# EAGLE board switch (EAGLE 9.2.2)
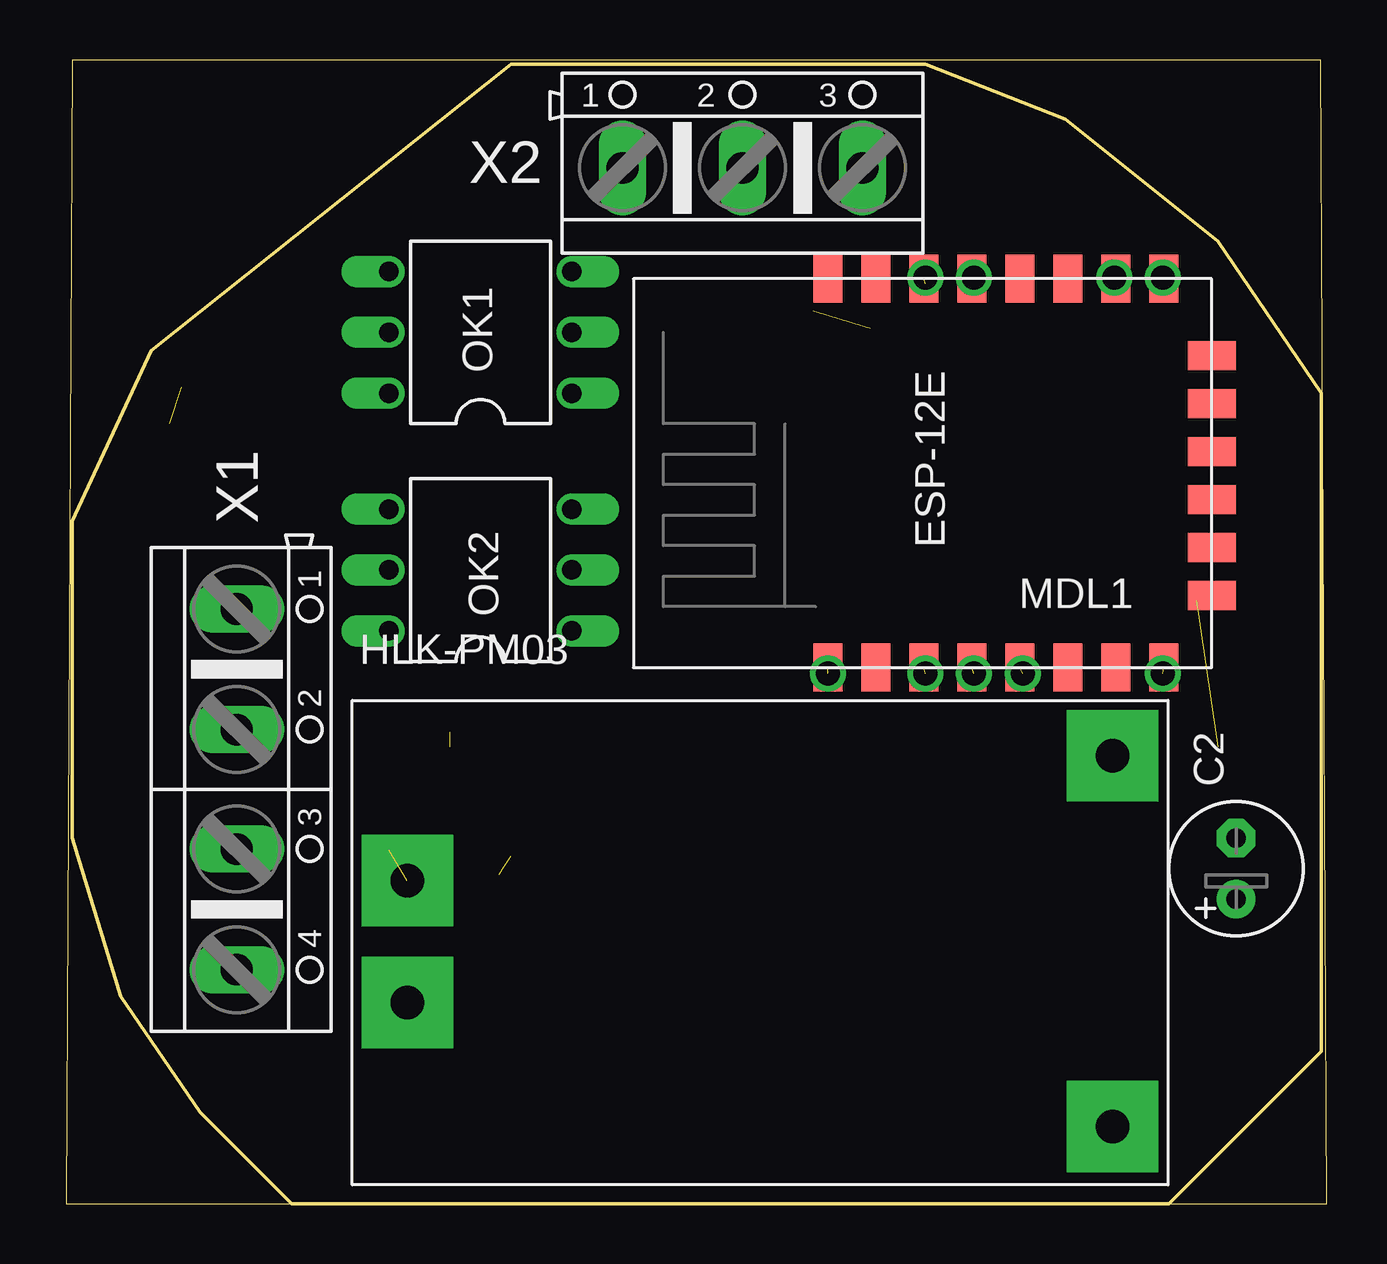
[diagram p0: board, top side]
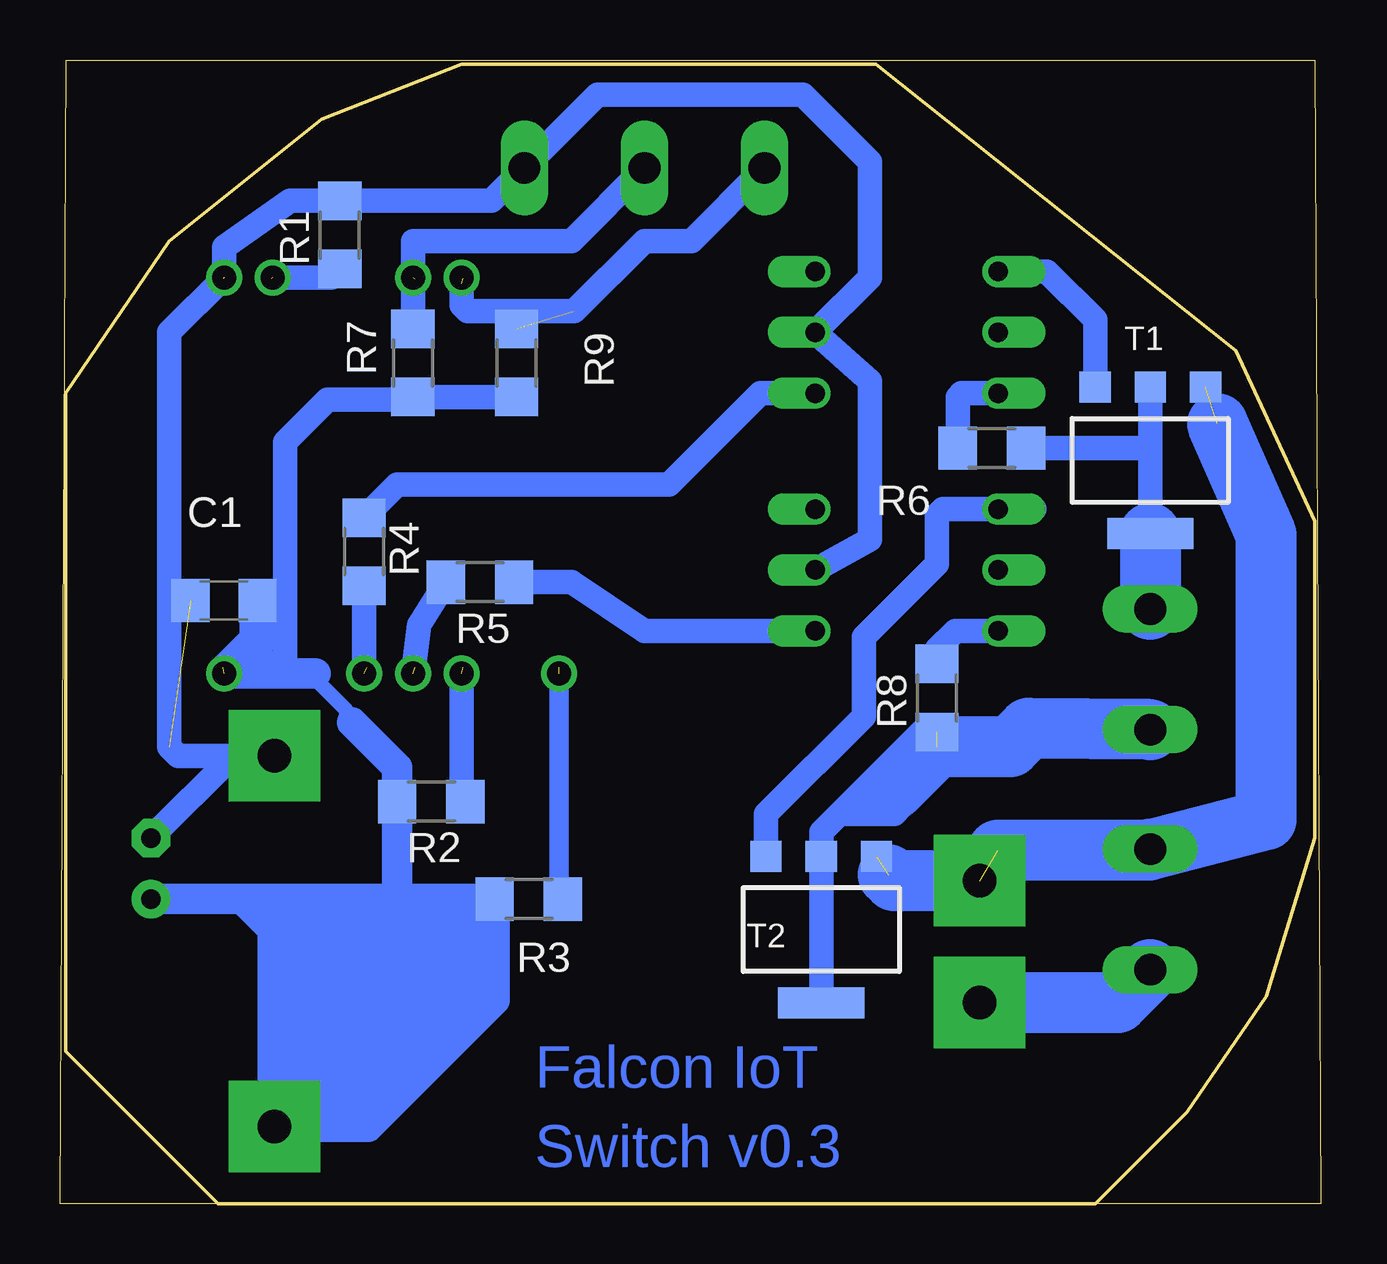
[diagram p1: board, bottom side, seen from below]

Size 52.56 x 47.68 mm. Coordinates in mm from the lower left corner, seen from the top.
Outline: 9.4,0 0,0 0.25,47.68 52.3,47.68 52.56,0 45.97,0
Outline: 45.97,0 52.32,6.35 52.32,33.78 48.01,40.13 41.66,45.21 35.81,47.5 18.54,47.5 3.56,35.56 0.25,28.45 0.25,15.24 2.29,8.64 5.59,3.81 9.4,0
Outline: 9.4,0 45.97,0
Copper layers (1*16): Top 0.035mm / dielectric 1.5mm / Bottom 0.035mm
Design rules "default": minimum track width 6mil, minimum drill 0.35mm, track to track 6mil, track to pad 6mil, pad to pad 6mil, via to via 6mil, smd to smd 6mil, copper to edge 40mil, drill to drill 6mil, minimum pad ring 10mil, minimum via ring 8mil, stop-mask expansion 4mil, vias tented up to drill 0mil, thermal gap 10mil

## Footprints (pad centres in the part's own frame; a part is rotated, then mirrored left to right if it is on the bottom)
C1206 = smd 1.6 x 1.8: 1 -1.4,0; 2 1.4,0
E2,5-6 = drill 0.813 pad 1.6: + -1.27,0 | drill 0.813 pad 1.6 octagon: - 1.27,0
ESP8266-ESP12E = smd 2 x 1.2: 1 0,16; 2 0,14; 3 0,12; 4 0,10; 5 0,8; 6 0,6; 7 0,4; 8 0,2; 9 16.2,2; 10 16.2,4; 11 16.2,6; 12 16.2,8; 13 16.2,10; 14 16.2,12; 15 16.2,14; 16 16.2,16 | smd 1.2 x 2: 17 11,0; 18 3,0; 19 5,0; 20 13,0; 21 7,0; 22 9,0
DIL06 = drill 0.813 offset: 1 -2.54,-3.81; 2 0,-3.81; 3 2.54,-3.81; 4 2.54,3.81; 5 0,3.81; 6 -2.54,3.81
R1206 = smd 1.6 x 1.803: 1 -1.422,0; 2 1.422,0
SOT223 = smd 1.3 x 1.3: 1 -2.3,-3.05; 2 0,-3.05; 3 2.3,-3.05 | smd 3.6 x 1.3: 4 0,3.05
HLK-PM03 = drill 1.4 pad 3.81 square: +VO 29.4,-5.167; -VO 29.4,10.294; AC1 0,5.08; AC2 0,0
AK500/4 = drill 1.321 long: 1 -7.518,0; 2 -2.489,0; 3 2.489,0; 4 7.518,0
AK500/3 = drill 1.321 long: 1 -5.004,0; 2 0,0; 3 5.004,0

## Placement (x,y rotation side)
C1  100n  [C1206]  45.72,25.15 180 bottom
C2  22u  [E2,5-6]  48.77,13.97 90 top
MDL1  ESP12-F  [ESP8266-ESP12E]  47.75,22.35 90 top
OK1  MOC3033M  [DIL06]  17.27,36.32 90 top
OK2  MOC3033M  [DIL06]  17.27,26.42 90 top
R1  10k  [R1206]  40.89,40.39 90 bottom
R2  10k  [R1206]  37.08,16.76 180 bottom
R3  10k  [R1206]  33.02,12.7 180 bottom
R4  200  [R1206]  39.88,27.18 270 bottom
R5  200  [R1206]  35.05,25.91 180 bottom
R6  100  [R1206]  13.72,31.5 180 bottom
R7  10k  [R1206]  37.85,35.05 90 bottom
R8  100  [R1206]  16,21.08 90 bottom
R9  10k  [R1206]  33.53,35.05 90 bottom
T1  Z0109MN0  [SOT223]  7.11,30.99 180 bottom
T2  Z0109MN0  [SOT223]  20.83,11.43 180 bottom
U$1  HLK-PM03  [HLK-PM03]  14.22,8.38 0 top
X1  ARK4  [AK500/4]  7.11,17.27 270 top
X2  ARK3  [AK500/3]  28.19,43.18 0 top

## Library data of the parts
C1 = eagle-ltspice; SPICEMODEL: NONE; SPICEPREFIX: C
C2 = rcl; SPICEPREFIX: C
MDL1 = ESP8266-ESP12E
OK1 OK2 = optocoupler; MF: FAIRCHILD SEMICONDUCTOR; MPN: MOC3033-M; OC_FARNELL: 1133987; OC_NEWARK: 72K8898
R1-R9 = eagle-ltspice; SPICEMODEL: NONE; SPICEPREFIX: R
T1 T2 = nxp_60_1_1; 12NC: 9340 650 56135
U$1 = PowerSocket
X1 X2 = con-ptr500; OC_FARNELL: unknown; OC_NEWARK: unknown

## Nets
GND: C1.2 C2.- MDL1.9 OK1.2 OK2.2 R1.2 U$1.-VO X2.3
N$1: MDL1.10 R1.1
N$2: MDL1.1 R3.1
N$3: MDL1.3 R2.1
N$4: C1.1 C2.+ MDL1.8 R2.2 R3.2 R7.1 R9.1 U$1.+VO
N$5: OK1.6 R6.2
N$7: OK2.6 R8.2
N$9: OK2.1 R5.1
N$10: OK1.1 R4.1
N$11: MDL1.4 R5.2
N$12: MDL1.5 R4.2
N$14: OK1.4 T1.3
N$15: R8.1 T2.2 T2.4 X1.2
N$16: OK2.4 T2.3
N$17: U$1.AC2 X1.4
N$19: T1.1 T2.1 U$1.AC1 X1.3
N$20: MDL1.14 R9.2 X2.1
N$21: MDL1.13 R7.2 X2.2
N$22: R6.1 T1.2 T1.4 X1.1

## Tracks (layer width: path | path; a pad name or v marks a point on that pad's centre or on a via)
GND  (via drill 1)  (2 unrouted)
  Bottom 1.016: OK2.2 18.8,27.69 18.8,34.29 OK1.2 18.8,38.61 18.8,43.43 21.59,46.23 30.15,46.23 X2.3 34.57,41.81 R1.2 42.96,41.81 45.72,39.88 v45.72,38.61 48.01,36.32 48.01,19.05 47.63,18.68 U$1.-VO 45.33,18.68 C2.-
N$1  (via drill 1)  (1 unrouted)
  Bottom 1.016: R1.1 41.25,38.61 v43.69,38.61
N$2  (via drill 1)  (1 unrouted)
  Bottom 0.813: v31.75,22.1 31.75,12.85 R3.1
N$3  (via drill 1)  (1 unrouted)
  Bottom 1.016: R2.1 35.81,16.76 v35.81,22.1
N$4  (via drill 1)  (1 unrouted)
  Bottom 0.61: 40.39,20.07 40.64,20.32 40.64,20.57 41.91,21.84 41.91,22.1
  Bottom 1.016: R3.2 34.7,12.95 | R9.1 R7.1 37.95,33.53 41.4,33.53 43.18,31.75 43.18,22.1 | 43.69,22.1 43.69,22.35 43.94,22.61
  Bottom 1.27: 34.44,8.48 34.44,10.16 | 34.44,10.16 34.44,11.68 | 34.44,11.68 R3.2 38.1,12.7 | 36.7,6.22 39.71,3.21 U$1.+VO 43.69,3.28 43.69,6.1 | 36.7,6.22 35.31,7.62 | 35.31,7.62 34.44,8.48 | 38.1,12.7 38.51,13.11 R2.2 38.51,18.19 40.39,20.07 | 43.69,6.1 43.69,7.62 | 43.69,7.62 43.69,8.89 | 43.69,8.89 43.69,10.16 | 43.69,10.16 43.69,11.43 | 43.69,11.43 44.96,12.7 C2.+ 38.1,12.7 | 34.44,11.68 34.7,11.43 43.69,11.43 | 43.69,10.16 34.44,10.16 | 34.44,8.48 34.85,8.89 43.69,8.89 | 43.69,7.62 35.31,7.62 | 36.7,6.22 43.56,6.22 43.69,6.1 | 43.69,7.62 43.18,7.11 36.83,7.11 38.86,5.08 43.18,5.08 42.16,4.06 39.62,4.06 | 41.91,22.1 43.18,22.1 43.69,22.1 v45.72,22.1
  Bottom 1.524: C1.1 44.32,23.5 v45.72,22.1
N$5
  Bottom 1.016: OK1.6 14.99,33.78 15.14,33.63 R6.2
N$7
  Bottom 1.016: OK2.6 15.24,23.88 16,23.11 R8.2
N$9
  Bottom 1.016: OK2.1 28.19,23.88 31.24,25.91 R5.1
N$10
  Bottom 1.016: R4.1 38.51,29.97 27.18,29.97 23.37,33.78 OK1.1
N$11  (via drill 1)  (1 unrouted)
  Bottom 1.016: R5.2 37.59,24.13 v37.85,22.1
N$12  (via drill 1)  (1 unrouted)
  Bottom 1.016: R4.2 v39.88,22.1
N$13  (via drill 1)
  other vias: 35.81,38.61
N$14
  Bottom 1.016: T1.3 9.41,36.84 11.43,38.86 OK1.4
N$15  (1 unrouted)
  Bottom 1.016: 20.07,16.26 20.83,15.49 T2.2 T2.4 | 20.07,16.26 16.66,19.66 R8.1 | 20.07,16.26 17.78,16.26 17.53,16.51
  Bottom 2.54: X1.2 12.19,19.81 12.95,19.05 16,19.05 17.78,17.27
N$16
  Bottom 1.016: 11.94,28.96 OK2.4 15.75,28.96 16,28.7 16,26.67 19.05,23.62 19.05,20.32 23.13,16.24 T2.3
N$17
  Bottom 2.54: X1.4 8.48,8.38 U$1.AC2
N$19  (3 unrouted)
  Bottom 2.54: X1.3 7.16,14.73 | 7.16,14.73 13.46,14.73 | 7.16,14.73 2.29,16 2.29,27.89 4.32,32.51 | 14.73,12.95 U$1.AC1 17.78,13.46 18.03,13.72
N$20  (2 unrouted)
  Bottom 1.016: X2.1 26.24,40.13 28.19,40.13 31.13,37.2 35.56,37.2 35.81,37.45 35.81,38.35
N$21  (via drill 1)  (1 unrouted)
  Bottom 1.016: X2.2 31.24,40.13 37.85,40.13 v37.85,38.61 R7.2
N$22
  Bottom 1.016: T1.2 7.11,31.5 | 7.11,31.5 T1.4 | R6.1 7.11,31.5
  Bottom 2.54: T1.4 X1.1

## Text on the board
Bottom: Falcon IoT | Switch v0.3